# Altium PCB TankNode-PcbDoc.PcbDoc (part 2 of 2)
Units mm, origin at the board's own origin, x right, y up, seen from the top; angles counter-clockwise.
Board outline 71.69 x 57.78 mm, 2 copper layers (Top Layer, Bottom Layer); 78 components, 47 nets, 269 pads, 343 vias.
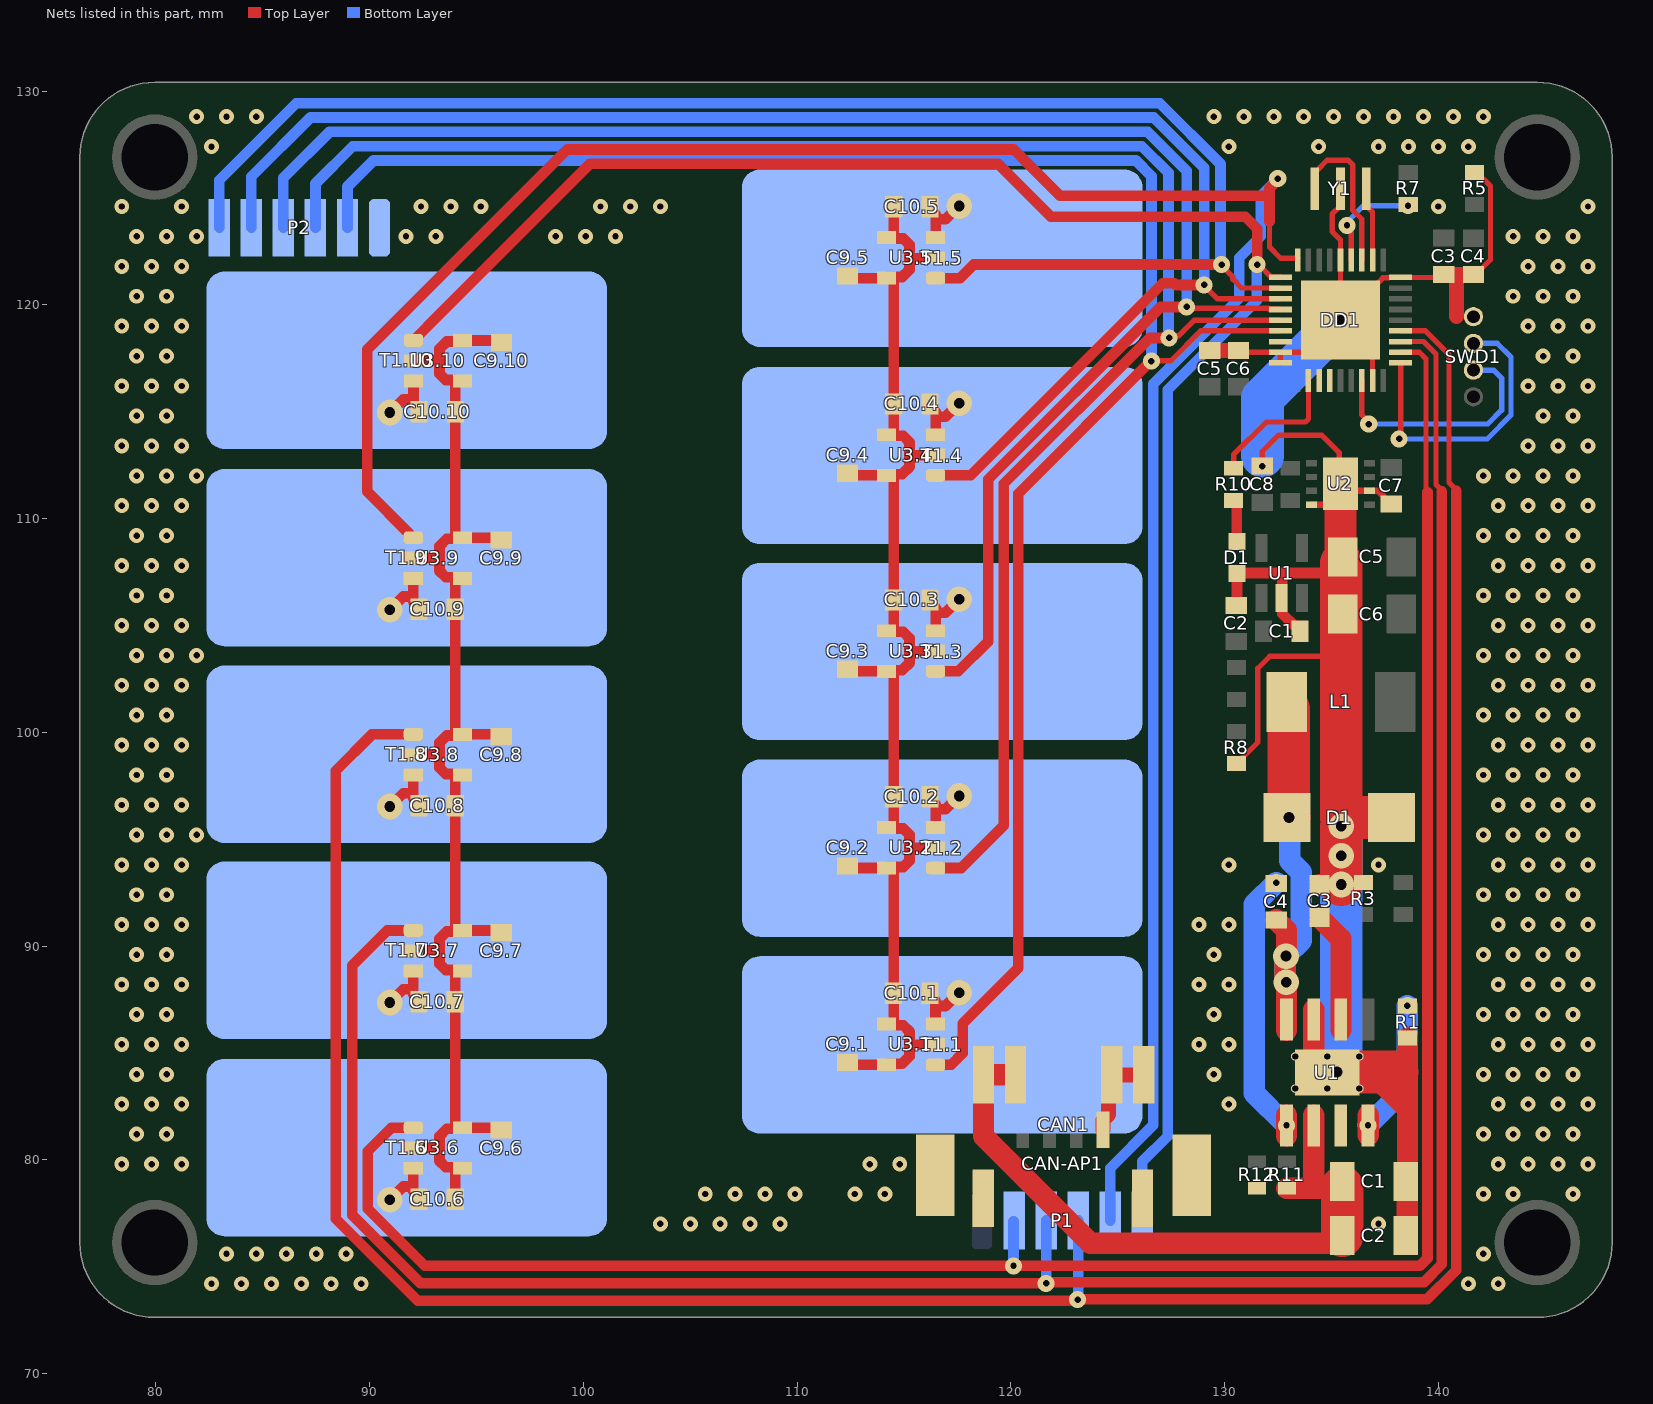
[diagram p2: the nets of this part, all layers, seen from the top]

## Via types
v1: diameter 0.7, hole 0.3, Top Layer to Bottom Layer, tented both sides, 280 vias
v2: diameter 0.8, hole 0.3, Top Layer to Bottom Layer, tented both sides, 45 vias
v3: diameter 1.2, hole 0.5, Top Layer to Bottom Layer, tented both sides, 18 vias

## Nets (pads, with @x,y where several pads share a name; then routed paths per layer and width w, separated by ;. In a path a pad name is that pad's centre, name@x,y a point inside that pad or via, vN(x,y) a via of type N, cw(c..) or ccw(c..) an arc to the next point about the centre after c; other vN are vias at no path point) (continued)
GND: C1.2 C2.2 C3.1@134.439,92.877 C3.2@140.25,121.417 C4.2@141.64,121.413 C5.1@135.521,108.201 C5.2@129.3,117.865 C6.1@135.521,105.534 C6.2@130.65,117.865 C7.2 C8.2 C9.1.1 C9.2.1 C9.3.1 C9.4.1 C9.5.1 C9.6.1 C9.7.1 C9.8.1 C9.9.1 C9.10.1 C10.1.2 C10.2.2 C10.3.2 C10.4.2 C10.5.2 C10.6.2 C10.7.2 C10.8.2 C10.9.2 C10.10.2 CAN1.5 CAN1.6 CAN1.P1 CAN1.P2 CAN-AP1.4 CAN-AP1.SH1 CAN-AP1.SH2 D1.A@137.807,96.009 D1.C@130.575,107.42 DD1.5 DD1.17 DD1.18 DD1.26 DD1.36 DD1.37 P2.1 R1.1 R3.1 R5.1 R8.1 R12.1 SWD1.1 U1.2@132.67,106.282 U1.7 U1.9 U2.2 U2.8 U2.P$9 U3.1.2 U3.1.4 U3.1.6 U3.2.2 U3.2.4 U3.2.6 U3.3.2 U3.3.4 U3.3.6 U3.4.2 U3.4.4 U3.4.6 U3.5.2 U3.5.4 U3.5.6 U3.6.2 U3.6.4 U3.6.6 U3.7.2 U3.7.4 U3.7.6 U3.8.2 U3.8.4 U3.8.6 U3.9.2 U3.9.4 U3.9.6 U3.10.2 U3.10.4 U3.10.6 Y1.2 | length 246.2
  Top Layer w0.25: R8.1@130.55,98.53 130.65,98.53 130.875,98.755 130.875,98.855 131.55,99.53 131.55,102.99 132.11,103.55 135.457,103.55 ; C6.2@130.65,117.865 130.735,117.78 DD1.17@132.605,117.78 ; v2(131.76,112.453) 131.76,113.139 132.521,113.9 134.54,113.9 135.366,113.074 135.366,111.674 U2.P$9@135.42,111.62 ; DD1.18@132.605,117.28 DD1.17@132.605,117.78 ; Y1.2@135.42,125.43 135.42,124.63 135.03,124.24 135.03,123.427 135.42,123.037 DD1.5@135.42,122.095 v3(135.42,119.28) ; DD1.26@136.92,116.465 136.92,117.78 v3(135.42,119.28) ; C3.2@140.087,121.28 DD1.36@138.235,121.28 138.23,121.275 137.687,121.275 137.672,121.26 137.4,121.26 137.145,121.005 137.002,120.861 v3(135.42,119.28) ; C4.2@141.64,121.413 141.74,121.413 142.015,121.688 142.435,122.108 142.435,125.548 141.79,126.193 R5.1@141.69,126.193 ; DD1.17@132.605,117.78 133.92,117.78 v3(135.42,119.28)
  Top Layer w0.3: U2.8@134.058,110.645 134.912,110.645 135.412,111.145 135.562,111.295 U2.2@136.783,111.295 137.175,111.295 137.44,111.03 137.44,110.93 137.69,110.68 C7.2@137.79,110.68
  Top Layer w0.5: U3.6.2@92.043,80.551 92.058,80.566 93.263,80.566 ; U3.7.2@92.043,89.781 92.058,89.796 93.263,89.796 ; U3.8.2@92.043,98.951 92.058,98.966 93.263,98.966 ; U3.9.2@92.043,108.151 92.058,108.166 93.263,108.166 ; U3.10.2@92.046,117.384 92.061,117.399 93.266,117.399 ; U3.7.6@93.936,90.673 94.003,90.74 C10.8.2@94.003,96.561 94.003,97.972 93.925,98.051 93.556,98.051 93.263,98.344 93.263,98.966 ; U3.7.6@93.936,90.681 93.61,90.681 93.263,90.334 93.263,89.796 ; U3.8.6@93.961,99.885 94.003,99.927 C10.9.2@94.003,105.761 94.003,107.172 93.925,107.251 93.556,107.251 93.263,107.544 93.263,108.166 ; C10.6.2@94.003,78.161 94.003,79.572 93.925,79.651 93.556,79.651 93.263,79.944 93.263,80.566 ; U3.9.6@94.025,109.059 94.006,109.078 C10.10.2@94.006,114.994 94.006,116.406 93.927,116.484 93.559,116.484 93.266,116.777 93.266,117.399 ; U3.7.6@94.293,90.681 U3.7.6@94.343,90.731 96.063,90.731 C9.7.1@96.163,90.631 ; C9.6.1@96.163,81.401 96.063,81.501 U3.6.6@94.343,81.501 94.293,81.451 U3.6.6@93.952,81.451 ; C9.8.1@96.163,99.801 96.063,99.901 U3.8.6@94.343,99.901 94.293,99.851 93.61,99.851 93.263,99.504 93.263,98.966 ; C9.9.1@96.163,109.001 96.063,109.101 U3.9.6@94.343,109.101 94.293,109.051 93.61,109.051 93.263,108.704 93.263,108.166 ; C9.10.1@96.166,118.234 96.066,118.334 U3.10.6@94.346,118.334 94.296,118.284 93.613,118.284 93.266,117.937 93.266,117.399 ; C9.1.1@112.354,84.546 112.454,84.446 U3.1.6@114.174,84.446 114.224,84.496 114.907,84.496 115.254,84.843 115.254,85.381 ; C9.2.1@112.357,93.749 112.457,93.649 U3.2.6@114.177,93.649 114.227,93.699 114.964,93.699 115.257,93.992 115.257,94.584 ; C9.3.1@112.357,102.949 112.457,102.849 U3.3.6@114.177,102.849 U3.3.6@114.227,102.899 ; C9.4.1@112.357,112.119 112.457,112.019 U3.4.6@114.177,112.019 114.227,112.069 U3.4.6@114.568,112.069 ; C9.5.1@112.357,121.349 112.457,121.249 U3.5.6@114.177,121.249 114.227,121.299 U3.5.6@114.568,121.299 ; C10.5.2@114.517,124.589 114.517,123.178 114.595,123.099 114.964,123.099 115.257,122.806 115.257,122.184 ; U3.2.6@114.522,93.667 114.514,93.658 C10.1.2@114.514,87.786 114.514,86.374 114.593,86.296 114.961,86.296 115.254,86.003 115.254,85.381 ; U3.3.6@114.561,102.899 114.91,102.899 115.257,103.246 115.257,103.784 ; U3.3.6@114.561,102.904 114.517,102.86 C10.2.2@114.517,96.989 114.517,95.578 114.595,95.499 114.964,95.499 115.257,95.206 115.257,94.584 ; U3.1.2@116.474,85.396 116.459,85.381 115.254,85.381 ; U3.2.2@116.477,94.599 116.462,94.584 115.257,94.584 ; U3.3.2@116.477,103.799 116.462,103.784 115.257,103.784 ; U3.4.2@116.477,112.969 116.462,112.954 115.257,112.954 ; U3.5.2@116.477,122.199 116.462,122.184 115.257,122.184 ; C2.2@130.55,105.94 130.575,105.965 D1.C@130.575,107.42 ; D1.C@130.575,107.449 132.699,107.449 ; C1.2@133.52,104.73 133.52,104.83 133.37,104.98 133.27,104.98 132.699,105.551 132.699,106.252 U1.2@132.67,106.282 132.699,106.311 132.699,107.449 ; C5.1@135.521,108.201 135.521,107.981 135.457,107.916 135.081,107.541 134.861,107.541 134.77,107.449 132.699,107.449 ; 93.263,80.566 93.263,81.104 93.61,81.451 U3.6.6@93.952,81.451 ; 93.263,89.796 93.263,89.174 93.556,88.881 93.925,88.881 94.003,88.802 C10.7.2@94.003,87.391 94.003,81.502 U3.6.6@93.952,81.451 ; U3.4.6@114.568,112.069 114.91,112.069 115.257,112.416 115.257,112.954 ; U3.4.6@114.568,112.069 114.517,112.018 C10.3.2@114.517,106.189 114.517,104.778 114.595,104.699 114.964,104.699 115.257,104.406 115.257,103.784 ; U3.5.6@114.568,121.299 114.91,121.299 115.257,121.646 115.257,122.184 ; U3.5.6@114.568,121.299 114.517,121.248 C10.4.2@114.517,115.359 114.517,113.948 114.595,113.869 114.964,113.869 115.257,113.576 115.257,112.954
  Top Layer w0.7: CAN-AP1.4@124.307,81.403 124.307,81.853 124.567,82.114 124.567,83.827 CAN1.5@124.717,83.977 CAN1.6@126.217,83.977 ; C5.2@129.3,117.865 C6.2@130.65,117.865 ; C3.2@140.25,121.417 140.252,121.415 141.638,121.415 C4.2@141.64,121.413 ; 140.839,119.445 140.839,121.066
  Top Layer w1: U1.9@134.166,84.648 U1.7@134.166,86.558 U1.7@134.166,87.02 ; C3.1@134.439,92.877 v3(135.457,92.877) ; 137.457,83.924 137.457,83.47 138.557,82.37 ; C2.2@138.472,76.451 C2.2@138.547,76.376 ; C1.2@138.547,78.991 138.547,78.138 138.55,78.135 C2.2@138.55,76.864 ; C1.2@138.557,78.991 138.557,82.37 ; R1.1@138.557,85.693 138.557,82.37
  Top Layer w1.5: U2.P$9@135.412,111.145 135.412,108.41 135.461,108.361 135.461,108.261 C5.1@135.521,108.201
  Top Layer w2: v3(135.26,84.11) 138.069,84.11 138.07,84.111 ; v3(135.457,92.877) 135.46,92.88 v3(135.46,94.23) v3(135.46,95.6) ; v3@135.457,96.136 135.457,103.55 C5.1@135.457,107.916 ; v3@135.46,96.009 D1.A@137.807,96.009
  Bottom Layer w2: 131.77,112.927 131.77,115.63 v3(135.42,119.28) ; v3@135.46,84.07 v3(135.46,94.23) v3@135.46,95.37
  other v1: 82.6,74.2 84,74.2 85.4,74.2 86.8,74.2 88.2,74.2 89.6,74.2 141.4,74.2 142.8,74.2 83.3,75.6 84.7,75.6 86.1,75.6 87.5,75.6 88.9,75.6 142.1,75.6 103.6,77 105,77 106.4,77 107.8,77 109.2,77 137.2,77 105.7,78.4 107.1,78.4 108.5,78.4 109.9,78.4 112.7,78.4 114.1,78.4 142.1,78.4 143.5,78.4 146.3,78.4 78.4,79.8 79.8,79.8 81.2,79.8 113.4,79.8 114.8,79.8 142.8,79.8 144.2,79.8 145.6,79.8 147,79.8 79.1,81.2 80.5,81.2 142.1,81.2 143.5,81.2 144.9,81.2 146.3,81.2 78.4,82.6 79.8,82.6 81.2,82.6 130.2,82.6 142.8,82.6 144.2,82.6 145.6,82.6 147,82.6 79.1,84 80.5,84 129.5,84 142.1,84 143.5,84 144.9,84 146.3,84 78.4,85.4 79.8,85.4 81.2,85.4 128.8,85.4 130.2,85.4 142.8,85.4 144.2,85.4 145.6,85.4 147,85.4 79.1,86.8 80.5,86.8 129.5,86.8 142.1,86.8 143.5,86.8 144.9,86.8 146.3,86.8 78.4,88.2 79.8,88.2 81.2,88.2 128.8,88.2 130.2,88.2 142.8,88.2 144.2,88.2 145.6,88.2 147,88.2 79.1,89.6 80.5,89.6 129.5,89.6 142.1,89.6 143.5,89.6 144.9,89.6 146.3,89.6 78.4,91 79.8,91 81.2,91 128.8,91 130.2,91 142.8,91 144.2,91 145.6,91 147,91 79.1,92.4 80.5,92.4 142.1,92.4 143.5,92.4 144.9,92.4 146.3,92.4 78.4,93.8 79.8,93.8 81.2,93.8 130.2,93.8 137.2,93.8 142.8,93.8 144.2,93.8 145.6,93.8 147,93.8 79.1,95.2 80.5,95.2 81.9,95.2 142.1,95.2 143.5,95.2 144.9,95.2 146.3,95.2 78.4,96.6 79.8,96.6 81.2,96.6 142.8,96.6 144.2,96.6 145.6,96.6 147,96.6 79.1,98 80.5,98 142.1,98 143.5,98 144.9,98 146.3,98 78.4,99.4 79.8,99.4 81.2,99.4 142.8,99.4 144.2,99.4 145.6,99.4 147,99.4 79.1,100.8 80.5,100.8 142.1,100.8 143.5,100.8 144.9,100.8 146.3,100.8 78.4,102.2 79.8,102.2 81.2,102.2 142.8,102.2 144.2,102.2 145.6,102.2 147,102.2 79.1,103.6 80.5,103.6 81.9,103.6 142.1,103.6 143.5,103.6 144.9,103.6 146.3,103.6 78.4,105 79.8,105 81.2,105 142.8,105 144.2,105 145.6,105 147,105 79.1,106.4 80.5,106.4 142.1,106.4 143.5,106.4 144.9,106.4 146.3,106.4 78.4,107.8 79.8,107.8 81.2,107.8 142.8,107.8 144.2,107.8 145.6,107.8 147,107.8 79.1,109.2 80.5,109.2 142.1,109.2 143.5,109.2 144.9,109.2 146.3,109.2 78.4,110.6 79.8,110.6 81.2,110.6 142.8,110.6 144.2,110.6 145.6,110.6 147,110.6 79.1,112 80.5,112 81.9,112 142.1,112 143.5,112 144.9,112 146.3,112 78.4,113.4 79.8,113.4 81.2,113.4 144.2,113.4 145.6,113.4 147,113.4 79.1,114.8 80.5,114.8 144.9,114.8 146.3,114.8 78.4,116.2 79.8,116.2 81.2,116.2 144.2,116.2 145.6,116.2 147,116.2 79.1,117.6 80.5,117.6 144.9,117.6 146.3,117.6 78.4,119 79.8,119 81.2,119 144.2,119 145.6,119 147,119 79.1,120.4 80.5,120.4 143.5,120.4 144.9,120.4 146.3,120.4 78.4,121.8 79.8,121.8 81.2,121.8 144.2,121.8 145.6,121.8 147,121.8 79.1,123.2 80.5,123.2 81.9,123.2 91.7,123.2 93.1,123.2 98.7,123.2 100.1,123.2 101.5,123.2 143.5,123.2 144.9,123.2 146.3,123.2 78.4,124.6 81.2,124.6 92.4,124.6 93.8,124.6 95.2,124.6 100.8,124.6 102.2,124.6 103.6,124.6 140,124.6 147,124.6 82.6,127.4 130.2,127.4 134.4,127.4 137.2,127.4 138.6,127.4 140,127.4 141.4,127.4 81.9,128.8 83.3,128.8 84.7,128.8 129.5,128.8 130.9,128.8 132.3,128.8 133.7,128.8 135.1,128.8 136.5,128.8 137.9,128.8 139.3,128.8 140.7,128.8 142.1,128.8
LED: DD1.20 R10.1 | length 6.6
  Top Layer w0.25: R10.1@130.42,112.353 130.42,112.99 131.95,114.52 133.774,114.52 133.92,114.666 DD1.20@133.92,116.465
NetC3_2: C3.2@134.439,91.337 U1.6 | length 5.7
  Top Layer w1: C3.2@134.439,91.337 135.442,90.333 U1.6@135.442,86.08
NetC4_1: C4.1@132.407,91.222 D1.C@132.907,96.009 L1.2 U1.8 | length 18.8
  Top Layer w1: C4.1@132.407,91.222 132.896,90.733 132.896,89.556 v3(132.87,89.53) 132.832,89.492 132.832,89.35 132.828,89.347 132.828,88.416 132.88,88.364 v3(132.88,88.31) 132.896,88.294 U1.8@132.896,86.558 U1.8@132.896,86.06
  Top Layer w2: D1.C@132.917,96.226 ccw(c133.224,96.226) v3(133.007,96.009) ; D1.C@132.997,96.226 L1.2@132.997,101.089
  Bottom Layer w1: v3(132.88,88.31) 132.88,88.364 132.828,88.416 132.828,89.347 132.832,89.35 132.832,89.492 v3(132.87,89.53) 133.58,90.24 133.58,93.455 133.045,93.989 133.045,95.971 v3(133.007,96.009)
NetC4_2: C4.2@132.407,92.922 U1.1@132.896,81.608 | length 13.4
  Top Layer w1: U1.1@132.896,81.11 v2(132.896,81.608) U1.1@132.896,82.09
  Bottom Layer w1: v2(132.41,92.97) 131.39,91.95 131.39,83.114 v2(132.896,81.608)
NetC10.1_1: C10.1.1 T1.1.1 U3.1.3 | length 2.9
  Top Layer w0.5: C10.1.1@116.214,87.786 116.214,87.686 116.474,87.426 116.474,87.196 ; U3.1.3@116.474,86.346 116.474,87.196 ; v3(117.584,87.816) 117.561,87.816 116.941,87.196 116.474,87.196
NetC10.2_1: C10.2.1 T1.2.1 U3.2.3 | length 2.9
  Top Layer w0.5: C10.2.1@116.217,96.989 116.217,96.889 116.477,96.629 116.477,96.399 ; U3.2.3@116.477,95.549 116.477,96.399 ; v3(117.587,97.019) 117.564,97.019 116.944,96.399 116.477,96.399
NetC10.3_1: C10.3.1 T1.3.1 U3.3.3 | length 2.9
  Top Layer w0.5: C10.3.1@116.217,106.189 116.217,106.089 116.477,105.829 116.477,105.599 ; U3.3.3@116.477,104.749 116.477,105.599 ; v3(117.587,106.219) 117.564,106.219 116.944,105.599 116.477,105.599
NetC10.4_1: C10.4.1 T1.4.1 U3.4.3 | length 2.9
  Top Layer w0.5: C10.4.1@116.217,115.359 116.217,115.259 116.477,114.999 116.477,114.769 ; U3.4.3@116.477,113.919 116.477,114.769 ; v3(117.587,115.389) 117.564,115.389 116.944,114.769 116.477,114.769
NetC10.5_1: C10.5.1 T1.5.1 U3.5.3 | length 2.9
  Top Layer w0.5: C10.5.1@116.217,124.589 116.217,124.489 116.477,124.229 116.477,123.999 ; U3.5.3@116.477,123.149 116.477,123.999 ; v3(117.587,124.619) 117.564,124.619 116.944,123.999 116.477,123.999
NetC10.6_1: C10.6.1 T1.6.1 U3.6.3 | length 2.9
  Top Layer w0.5: v3(90.933,78.131) 90.956,78.131 91.576,78.751 92.043,78.751 ; U3.6.3@92.043,79.601 92.043,78.751 ; C10.6.1@92.303,78.161 92.303,78.261 92.043,78.521 92.043,78.751
NetC10.7_1: C10.7.1 T1.7.1 U3.7.3 | length 2.9
  Top Layer w0.5: v3(90.933,87.361) 90.956,87.361 91.576,87.981 92.043,87.981 ; U3.7.3@92.043,88.831 92.043,87.981 ; C10.7.1@92.303,87.391 92.303,87.491 92.043,87.751 92.043,87.981
NetC10.8_1: C10.8.1 T1.8.1 U3.8.3 | length 2.9
  Top Layer w0.5: v3(90.933,96.531) 90.956,96.531 91.576,97.151 92.043,97.151 ; U3.8.3@92.043,98.001 92.043,97.151 ; C10.8.1@92.303,96.561 92.303,96.661 92.043,96.921 92.043,97.151
NetC10.9_1: C10.9.1 T1.9.1 U3.9.3 | length 2.9
  Top Layer w0.5: v3(90.933,105.731) 90.956,105.731 91.576,106.351 92.043,106.351 ; U3.9.3@92.043,107.201 92.043,106.351 ; C10.9.1@92.303,105.761 92.303,105.861 92.043,106.121 92.043,106.351
NetC10.10_1: C10.10.1 T1.10.1 U3.10.3 | length 2.9
  Top Layer w0.5: v3(90.936,114.964) 90.959,114.964 91.579,115.584 92.046,115.584 ; U3.10.3@92.046,116.434 92.046,115.584 ; C10.10.1@92.306,114.994 92.306,115.094 92.046,115.354 92.046,115.584
NetD1_A: D1.A@130.575,108.92 R10.2 | length 2
  Top Layer w0.5: R10.2@130.42,110.853 130.47,110.853 130.57,110.753 130.57,109.07 130.575,109.065 D1.A@130.575,108.92
NetR1_2: R1.2 U1.4@136.706,81.608 | length 7.3
  Top Layer w1: v2(136.706,81.608) U1.4@136.72,81.622 ; U1.4@136.72,81.14 U1.4@136.72,81.622 ; U1.4@136.72,82.08 U1.4@136.72,81.622
  Bottom Layer w1: v2(136.706,81.608) 138.55,83.452 v2(138.55,87.21)
NetU1_3: U1.3@135.436,81.608
OSC_IN: DD1.2 Y1.1 | length 3.5
  Top Layer w0.25: Y1.1@136.62,125.43 136.62,124.63 136.695,124.555 136.705,124.555 136.92,124.34 DD1.2@136.92,122.095
OSC_OUT: DD1.3 Y1.3 | length 7.5
  Top Layer w0.25: Y1.3@134.22,125.43 134.22,126.23 134.295,126.305 134.335,126.305 134.8,126.77 135.77,126.77 136,126.54 136,124.423 136.42,124.003 DD1.3@136.42,122.095
Q1: DD1.15 P2.2 U3.1.1 | length 93.2
  Top Layer w0.25: v2(126.574,117.366) 126.587,117.38 127.48,117.38 128.88,118.78 DD1.15@132.605,118.78
  Top Layer w0.5: U3.1.1@116.474,84.446 117.206,84.446 117.74,84.98 117.74,86.37 120.34,88.97 120.34,111.16 126.546,117.366 v2(126.574,117.366)
  Bottom Layer w0.5: P2.2@88.961,123.6 88.961,125.531 90.179,126.749 125.849,126.749 126.582,126.017 126.582,117.375 v2(126.574,117.366)
Q2: DD1.14 P2.3 U3.2.1 | length 87.4
  Top Layer w0.25: 126.99,118.45 v2@127.196,118.656 ; v2(127.402,118.45) 127.507,118.555 127.858,118.555 128.583,119.28 DD1.14@132.605,119.28
  Top Layer w0.5: U3.2.1@116.477,93.649 117.679,93.649 119.67,95.64 119.67,111.622 126.498,118.45 126.99,118.45 127.196,118.45 v2(127.402,118.45)
  Bottom Layer w0.5: P2.3@87.461,123.6 87.461,125.671 89.209,127.419 126.127,127.419 127.37,126.176 127.37,118.482 v2(127.402,118.45)
Q3: DD1.13 P2.4 U3.3.1 | length 80.3
  Top Layer w0.25: v2(128.22,119.9) 128.279,119.841 132.051,119.841 132.107,119.785 132.6,119.785 DD1.13@132.605,119.78
  Top Layer w0.5: U3.3.1@116.477,102.849 117.539,102.849 118.94,104.25 118.94,111.84 127,119.9 v2(128.22,119.9)
  Bottom Layer w0.5: P2.4@85.961,123.6 85.961,125.931 88.119,128.089 126.404,128.089 128.22,126.274 v2(128.22,119.9)
Q4: DD1.12 P2.5 U3.4.1 | length 74.7
  Top Layer w0.25: v2(129.04,120.93) 129.04,120.903 129.663,120.28 DD1.12@132.605,120.28
  Top Layer w0.5: U3.4.1@116.477,112.019 118.119,112.019 127.11,121.01 127.64,121.01 127.72,120.93 v2(129.04,120.93)
  Bottom Layer w0.5: P2.5@84.461,123.6 84.461,125.991 87.229,128.759 126.682,128.759 129.04,126.401 v2(129.04,120.93)
Q5: DD1.11 P2.6 U3.5.1 | length 73.4
  Top Layer w0.25: v2(129.86,121.883) 129.86,121.831 130.382,121.309 130.382,121.201 130.798,120.785 132.6,120.785 DD1.11@132.605,120.78
  Top Layer w0.5: U3.5.1@116.477,121.249 117.619,121.249 118.26,121.89 129.853,121.89 v2(129.86,121.883)
  Bottom Layer w0.5: P2.6@82.961,123.6 82.961,125.831 86.559,129.429 126.96,129.429 129.803,126.586 129.803,121.941 v2(129.86,121.883)
Q6: DD1.29 P1.2 U3.6.1 | length 101.5
  Top Layer w0.25: DD1.29@138.235,117.78 139.11,117.78 139.42,117.47 139.42,111.305 139.415,111.3
  Top Layer w0.5: U3.6.1@92.043,81.501 91.021,81.501 89.913,80.393 89.913,77.708 92.583,75.038 v2(120.121,75.038) 139.138,75.038 139.49,75.39 139.49,111.225
  Bottom Layer w0.5: v2(120.121,75.038) P1.2@120.121,77.13
Q7: DD1.30 P1.3 U3.7.1 | length 115.3
  Top Layer w0.25: DD1.30@138.235,118.28 139.3,118.28 139.89,117.69 139.89,111.595 140.16,111.326 140.16,111.265
  Top Layer w0.5: U3.7.1@92.043,90.731 90.821,90.731 89.18,89.09 89.18,77.42 92.382,74.218 v2(121.649,74.218) ; v2@121.73,74.276 139.323,74.276 140.16,75.112 140.16,111.265
  Bottom Layer w0.5: v2(121.649,74.218) P1.3@121.649,77.157
Q8: DD1.31 P1.4 U3.8.1 | length 129.3
  Top Layer w0.25: DD1.31@138.235,118.78 138.236,118.781 139.393,118.781 140.5,117.674 140.5,111.695 140.83,111.365 140.83,111.29
  Top Layer w0.5: U3.8.1@92.043,99.901 90.111,99.901 88.41,98.2 88.41,77.242 92.254,73.398 123.063,73.398 123.137,73.473 139.468,73.473 140.83,74.835 140.83,111.29
  Bottom Layer w0.5: v2(123.12,73.456) 123.149,73.484 P1.4@123.149,77.157
Q9: DD1.9 P1.5 U3.9.1 | length 113.7
  Top Layer w0.25: 132.1,123.9 132.1,122.7 132.625,122.175 DD1.9@133.415,122.175
  Top Layer w0.5: U3.9.1@92.043,109.101 91.893,109.101 91.843,109.151 91.843,109.301 89.88,111.264 89.88,117.91 99.24,127.27 120.13,127.27 122.3,125.1 132.1,125.1 ; 132.1,123.9 132.1,125.1 ; v2(132.485,125.9) 132.485,125.843 132.1,125.457 132.1,125.1
  Bottom Layer w0.5: P1.5@124.649,77.157 124.649,79.608 126.665,81.624 126.665,116.298 130.68,120.313 130.68,122.198 130.962,122.48 ; 130.962,122.48 131.69,123.208 131.69,125.105 v2(132.485,125.9)
Q10: DD1.10 P1.6 U3.10.1 | length 94.3
  Top Layer w0.25: v2(131.522,121.881) 131.594,121.881 132.19,121.285 DD1.10@132.654,121.285
  Top Layer w0.5: U3.10.1@92.046,118.334 92.196,118.334 92.246,118.384 92.246,118.534 93.142,119.43 100.312,126.6 119.4,126.6 121.88,124.12 130.962,124.12 131.522,123.56 v2(131.522,121.881)
  Bottom Layer w0.5: P1.6@126.149,77.157 126.149,79.919 127.335,81.105 127.335,116.021 131.5,120.186 131.5,121.859 v2(131.522,121.881)
RX: DD1.22
STM_NRST: DD1.4 R7.2 | length 5
  Top Layer w0.25: v2(135.725,123.715) 135.725,123.566 135.92,123.371 DD1.4@135.92,122.095
  Bottom Layer w0.25: v2(135.725,123.715) 135.725,123.864 136.502,124.64 v2(138.58,124.64)
SWDIO: DD1.25 SWD1.3 | length 11.6
  Top Layer w0.25: DD1.25@136.42,116.465 136.42,114.841 136.74,114.522 v2(136.74,114.42)
  Bottom Layer w0.25: v2(136.74,114.42) 142.31,114.42 142.96,115.07 142.96,116.57 142.586,116.945 SWD1.3@141.639,116.945
SWLK: DD1.28 SWD1.2 | length 14
  Top Layer w0.25: v2(138.16,113.725) 138.235,113.8 DD1.28@138.235,117.28
  Bottom Layer w0.25: v2(138.16,113.725) 142.285,113.725 143.4,114.84 143.4,117.55 142.756,118.195 SWD1.2@141.639,118.195
TX: DD1.21
VERSION: DD1.16
Vin: C1.1@135.502,78.991 C2.1@135.502,76.451 CAN1.1 CAN1.2 R11.2 U1.2@134.166,81.608 | length 32.1
  Top Layer w1: CAN1.2@120.217,83.977 CAN1.1@118.717,83.977 118.717,81.103 123.72,76.1 135.427,76.1 135.502,76.175 C2.1@135.502,76.451 ; R11.2@132.91,78.666 132.914,78.661 134.166,78.661 ; U1.2@134.166,82.08 U1.2@134.166,81.608 134.166,78.661 ; C1.1@135.502,78.991 135.502,78.736 135.427,78.661 134.166,78.661
  Top Layer w2: C2.1@135.502,76.458 C1.1@135.502,78.736
pads on no net: DD1.32 DD1.33 DD1.34 U1.4@133.61,108.618

## Polygon pours and split planes (outlines as drawn)
GND on Top Layer "GND_L01_P000" (solid, remove dead copper, pour order 0): 51.89,136.16 51.89,50.4 162.33,50.4 162.33,140.06 52.08,140.06
GND on Bottom Layer "GND_L02_P001" (solid, pour order 1): 53.23,137.14 53.23,59.07 154.89,59.07 154.89,137.14

## Silkscreen, mask and mechanical layers (free items; w line width, h text height)
Top Overlay:
  circle w0.5: c79.94,126.909 r2.7
  circle w0.5: c79.94,76.126 r2.7
  circle w0.5: c144.63,126.909 r2.7
  circle w0.5: c144.63,76.126 r2.7
  lines w0.5: 77.24,75.97 77.24,127.02 ; 79.79,73.43 144.75,73.43 ; 79.84,129.6 144.75,129.6 ; 147.33,76.126 147.33,126.909
Bottom Overlay:
  region: 133.732,106.898 ccw(c137.697,108.56) 134.217,106.035 ccw(c136.857,108.243) 139.855,106.555 cw(c136.929,109.142)
  region: 136.043,106.786 ccw(c136.57,109.709) 139.485,109.139 cw(c140.015,111.217) 138.604,109.602 cw(c135.943,109.449)
  region: 133.702,110.149 cw(c137.697,108.56) 134.126,110.954 cw(c135.004,106.638) 136.609,110.74 ccw(c139.479,108.542) 136.291,110.248 ccw(c135.124,106.862)
  region: 137.951,110.633 ccw(c140.015,111.217) 138.348,109.867 137.392,109.867
  region: 135.104,111.711 cw(c135.041,108.768) 136.742,111.17 ccw(c134.633,112.127) 136.229,113.805 cw(c133.861,113.729)
  region: 133.398,108.574 cw(c137.697,108.56) 133.446,109.202 cw(c135.374,106.531) 136.072,109.75 ccw(c139.479,108.542) 135.914,109.145 ccw(c135.292,106.056)
  region: 133.563,107.378 cw(c137.697,108.56) 133.438,107.968 cw(c135.142,105.934) 135.864,108.487 ccw(c139.479,108.542) 135.927,107.869 ccw(c135.255,105.165)
  region: 137.129,112.06 cw(c137.649,109.275) 140.336,108.375 ccw(c136.365,108.158)
  region: 139.971,106.85 140.615,106.73 ccw(c140.62,106.729) 140.619,106.723 ccw(c140.661,107.235) 140.661,107.747 ccw(c140.661,107.742) 140.661,107.747 ccw(c140.661,107.235) 140.651,107.747 140.661,107.747 cw(c140.661,107.235) 140.661,107.747 140.651,107.747 140.268,107.743 cw(c140.268,107.738) 140.268,107.743 ccw(c140.268,107.738) 140.263,107.74 139.967,106.857 ccw(c139.972,106.855)
  lines w0.01: 139.972,106.855 140.268,107.738 140.661,107.742 ; 140.611,107.74 cw(c140.661,107.235) 140.62,106.729
  lines w0.127: 133.398,108.574 cw(c137.697,108.56) 133.446,109.202 cw(c135.374,106.531) 136.072,109.75 ccw(c139.479,108.542) 135.914,109.145 ccw(c135.292,106.056) 133.398,108.574 ; 133.438,107.968 cw(c135.142,105.934) 135.864,108.487 ccw(c139.479,108.542) 135.927,107.869 ccw(c135.255,105.165) 133.563,107.378 cw(c137.697,108.56) 133.438,107.968 ; 133.702,110.149 cw(c135.124,106.862) 136.291,110.248 cw(c139.479,108.542) 136.609,110.74 ccw(c135.004,106.638) 134.126,110.954 ccw(c137.697,108.56) 133.702,110.149 ; 133.732,106.898 ccw(c136.929,109.142) 139.855,106.555 cw(c136.857,108.243) 134.217,106.035 cw(c137.697,108.56) 133.732,106.898 ; 135.104,111.711 cw(c135.041,108.768) 136.742,111.17 ccw(c134.633,112.127) 136.229,113.805 cw(c133.861,113.729) 135.104,111.711 ; 136.043,106.786 ccw(c135.943,109.449) 138.604,109.602 ccw(c140.015,111.217) 139.485,109.139 cw(c136.57,109.709) 136.043,106.786 ; 137.129,112.06 cw(c137.649,109.275) 140.336,108.375 ccw(c136.365,108.158) 137.129,112.06 ; 137.392,109.867 137.951,110.633 ccw(c140.015,111.217) 138.348,109.867 137.392,109.867
  lines w0.254: 126.627,90.496 ccw(c129.998,99.911) 128.759,89.988 ; 126.725,92.611 ccw(c129.998,99.911) 129.569,91.922 ; 126.779,91.506 ccw(c129.998,99.911) 129.31,90.937 ; 126.961,121.177 cw(c129.493,99.323) 134.647,120.711 ; 127.019,89.322 ccw(c129.998,99.911) 129.535,88.92 ; 127.411,93.726 ccw(c129.998,100.231) 129.358,93.26 ; 127.572,116.496 cw(c129.998,99.67) 133.288,116.349 ; 127.747,88.124 ccw(c129.998,99.911) 141.894,98.328 ; 127.772,118.539 cw(c129.998,99.67) 133.185,118.401 ; 128.852,85.717 ccw(c129.998,99.67) 141.449,107.724 ; 129.097,115.645 cw(c129.998,99.67) 132.847,83.926 ; 130.525,86.681 ccw(c129.998,99.67) 140.95,106.674 ; 131.049,84.707 ccw(c129.998,99.67) 142.256,108.315 ; 131.487,93.858 ccw(c129.998,99.67) 134.029,104.114 ; 131.934,89.859 ccw(c129.998,99.67) 138.672,104.645 ; 132.224,95.193 ccw(c129.998,99.67) 134.143,102.466 ; 132.273,93.05 ccw(c129.998,99.67) 135.801,103.584 ; 132.539,92.084 ccw(c129.998,99.67) 136.634,104.137 ; 132.637,91.066 ccw(c129.998,99.67) 137.607,104.476 ; 132.653,88.995 ccw(c129.998,99.67) 139.62,105.001 ; 135.106,83.55 ccw(c129.866,99.723) 141.094,112.488 ; 136.905,83.156 ccw(c129.866,99.723) 146.589,93.063 ; 138.315,82.704 ccw(c129.866,99.723) 146.818,91.142 ; 138.455,81.223 ccw(c129.519,100.228) 145.572,86.689 ; 140.02,80.895 ccw(c129.519,100.228) 145.784,85.414 ; 140.288,105.844 cw(c129.998,99.67) 141.819,97.607 ; 141.429,80.552 ccw(c129.519,100.228) 145.533,83.719 ; 142.058,113.032 cw(c129.998,99.67) 144.917,109.741 ; 143.011,115.394 cw(c129.493,99.323) 146.948,110.999 ; 143.629,117.466 cw(c129.493,99.323) 147.276,113.909
  text "Q5 / Q4 / Q3 / Q2 / Q1 / GND" at 91.1,128.535 h0.8 r90
  text "GND / SWCLK / SWIO / +3.3v" at 136.88,115.039 h0.7
  text "raccoonlab.org / FuelTank Node Version 1.0" at 129.979,88.217 h1 r270
  text "3v3 / Q6 / Q7 / Q8 / Q9 / Q10" at 126.8,81.535 h0.8 r90
  text "Github.com/ehsan2754" at 143.635,78.5 h1
Mechanical 2:
  the board outline again, w0.5